# EAGLE board motherBoard (EAGLE 9.5.2)
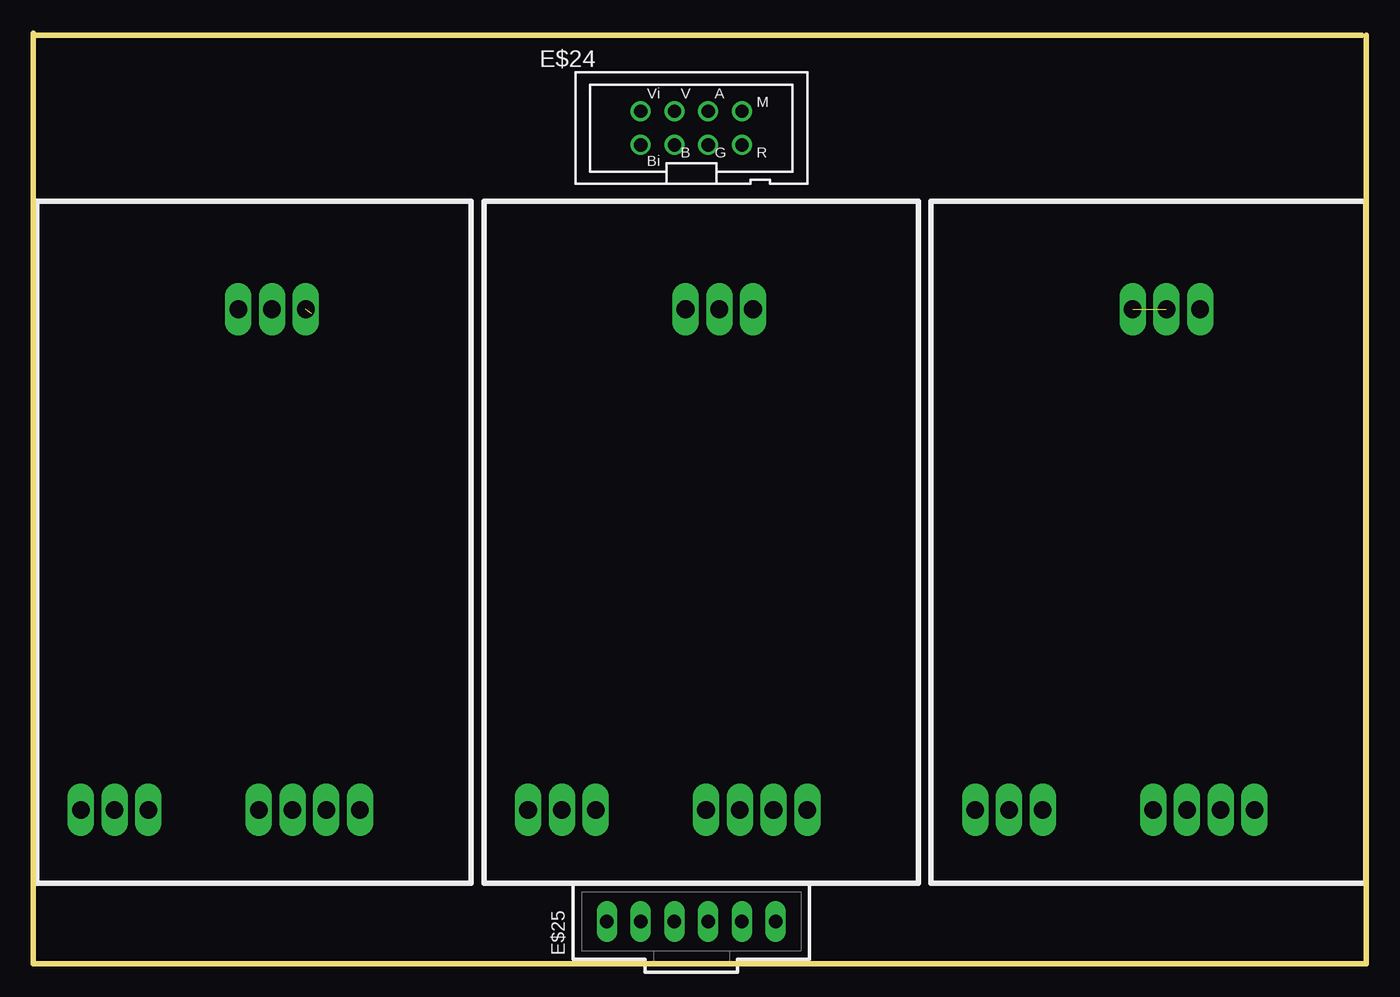
[diagram p0: board, top side]
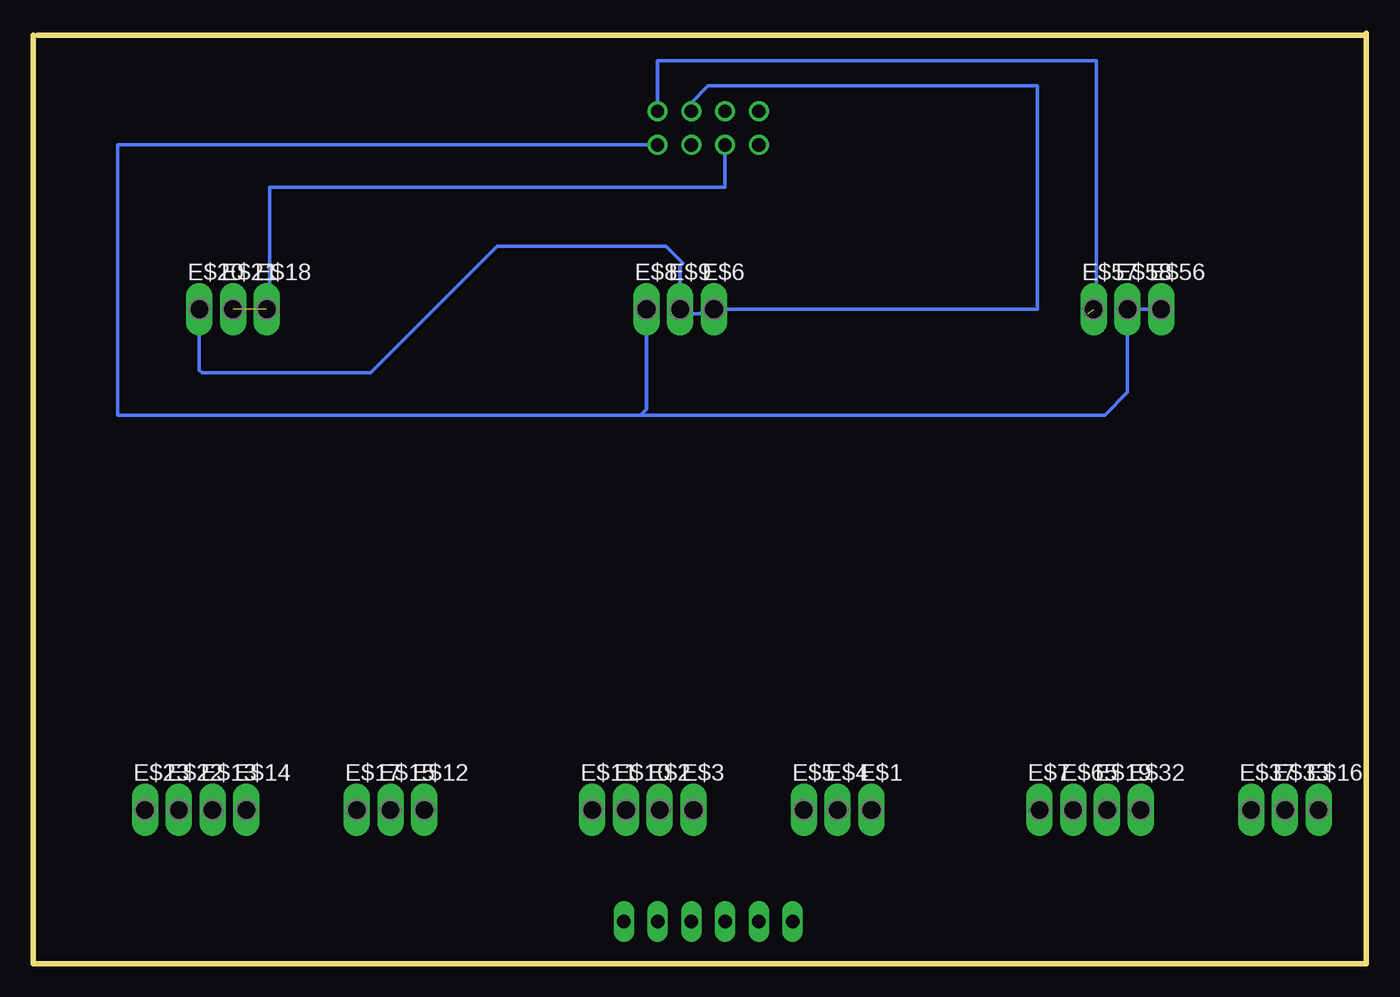
[diagram p1: board, bottom side, seen from below]

Size 100.33 x 70 mm. Coordinates in mm from the lower left corner, seen from the top.
Outline: 0,69.85 0,0 100.33,0 100.33,69.85
Outline: 0,69.85 0,70
Outline: 0,69.85 100,69.85
Copper layers (1*16): Top 0.035mm / dielectric 1.5mm / Bottom 0.035mm
Design rules "default": minimum track width 10mil, minimum drill 24mil, track to track 8mil, track to pad 8mil, pad to pad 8mil, via to via 8mil, smd to smd 8mil, copper to edge 40mil, drill to drill 8mil, minimum pad ring 10mil, minimum via ring 8mil, stop-mask expansion 4mil, vias tented up to drill 0mil, thermal gap 10mil

## Footprints (pad centres in the part's own frame; a part is rotated, then mirrored left to right if it is on the bottom)
P1-13Y = drill 1.321 pad 1.905 long: TP 0,0
PAK100/2500-8 = drill 1 pad 1.422: 3 -2.54,-1.27; 4 -2.54,1.27; 5 0,-1.27; 6 0,1.27; 7 2.54,-1.27; 8 2.54,1.27; 9 5.08,-1.27; 10 5.08,1.27
70543-06 = drill 1.016 long: 1 -6.35,0; 2 -3.81,0; 3 -1.27,0; 4 1.27,0; 5 3.81,0; 6 6.35,0

## Placement (x,y rotation side)
E$1  [P1-13Y]  37.24,11.57 0 bottom
E$2  [P1-13Y]  53.17,11.57 0 bottom
E$3  [P1-13Y]  50.63,11.57 0 bottom
E$4  [P1-13Y]  39.78,11.57 0 bottom
E$5  [P1-13Y]  42.33,11.57 0 bottom
E$6  [P1-13Y]  49.09,49.23 0 bottom
E$7  [P1-13Y]  24.6,11.57 0 bottom
E$8  [P1-13Y]  54.17,49.23 0 bottom
E$9  [P1-13Y]  51.63,49.23 0 bottom
E$10  [P1-13Y]  55.72,11.57 0 bottom
E$11  [P1-13Y]  58.26,11.57 0 bottom
E$12  [P1-13Y]  70.9,11.57 0 bottom
E$13  [P1-13Y]  86.83,11.57 0 bottom
E$14  [P1-13Y]  84.29,11.57 0 bottom
E$15  [P1-13Y]  73.44,11.57 0 bottom
E$16  [P1-13Y]  3.59,11.57 0 bottom
E$17  [P1-13Y]  75.98,11.57 0 bottom
E$18  [P1-13Y]  82.75,49.23 0 bottom
E$19  [P1-13Y]  19.52,11.57 0 bottom
E$20  [P1-13Y]  87.83,49.23 0 bottom
E$21  [P1-13Y]  85.29,49.23 0 bottom
E$22  [P1-13Y]  89.37,11.57 0 bottom
E$23  [P1-13Y]  91.91,11.57 0 bottom
E$24  [PAK100/2500-8]  48.26,62.87 0 top
E$25  [70543-06]  49.53,3.17 0 top
E$32  [P1-13Y]  16.98,11.57 0 bottom
E$33  [P1-13Y]  6.13,11.57 0 bottom
E$37  [P1-13Y]  8.67,11.57 0 bottom
E$56  [P1-13Y]  15.44,49.23 0 bottom
E$57  [P1-13Y]  20.52,49.23 0 bottom
E$58  [P1-13Y]  17.98,49.23 0 bottom
E$65  [P1-13Y]  22.06,11.57 0 bottom

## Library data of the parts
E$1-E$23 E$32 E$33 E$37 E$56-E$58 E$65 = testpad
E$24 = con-3m
E$25 = con-molex

## Nets
S$3: E$24.10 E$57.TP
S$4: E$8.TP E$24.9 E$56.TP E$58.TP
S$5: E$6.TP E$9.TP E$20.TP E$24.8
S$7: E$18.TP E$21.TP E$24.5
S$8: E$24.6
S$9: E$24.4
S$10: E$24.3

## Tracks (layer width: path | path; a pad name or v marks a point on that pad's centre or on a via)
S$3  (1 unrouted)
  Bottom 0.254: E$24.10 53.34,67.94 20.32,67.94 20.32,49.53 20.95,48.9
S$4
  Bottom 0.254: E$24.9 93.98,61.59 93.98,41.27 54.61,41.27 | 54.61,41.27 54.17,41.71 E$8.TP | E$56.TP E$58.TP 17.98,42.98 19.68,41.27 54.61,41.27
S$5
  Bottom 0.254: E$24.8 50.8,64.77 49.53,66.04 24.77,66.04 24.77,49.23 E$6.TP 49.83,49.23 50.16,48.9 51.3,48.9 E$9.TP 51.63,52.51 51.44,52.7 52.7,53.98 65.41,53.98 74.93,44.45 87.63,44.45 87.83,44.65 E$20.TP
S$7  (1 unrouted)
  Bottom 0.254: E$24.5 48.26,58.42 82.55,58.42 82.55,49.43 E$18.TP

## Text on the board
tPlace: Vi | V | A | M | B | G | R | Bi